# EAGLE board MotherBoardRev2 (EAGLE 7.3.0), part 1 of 2
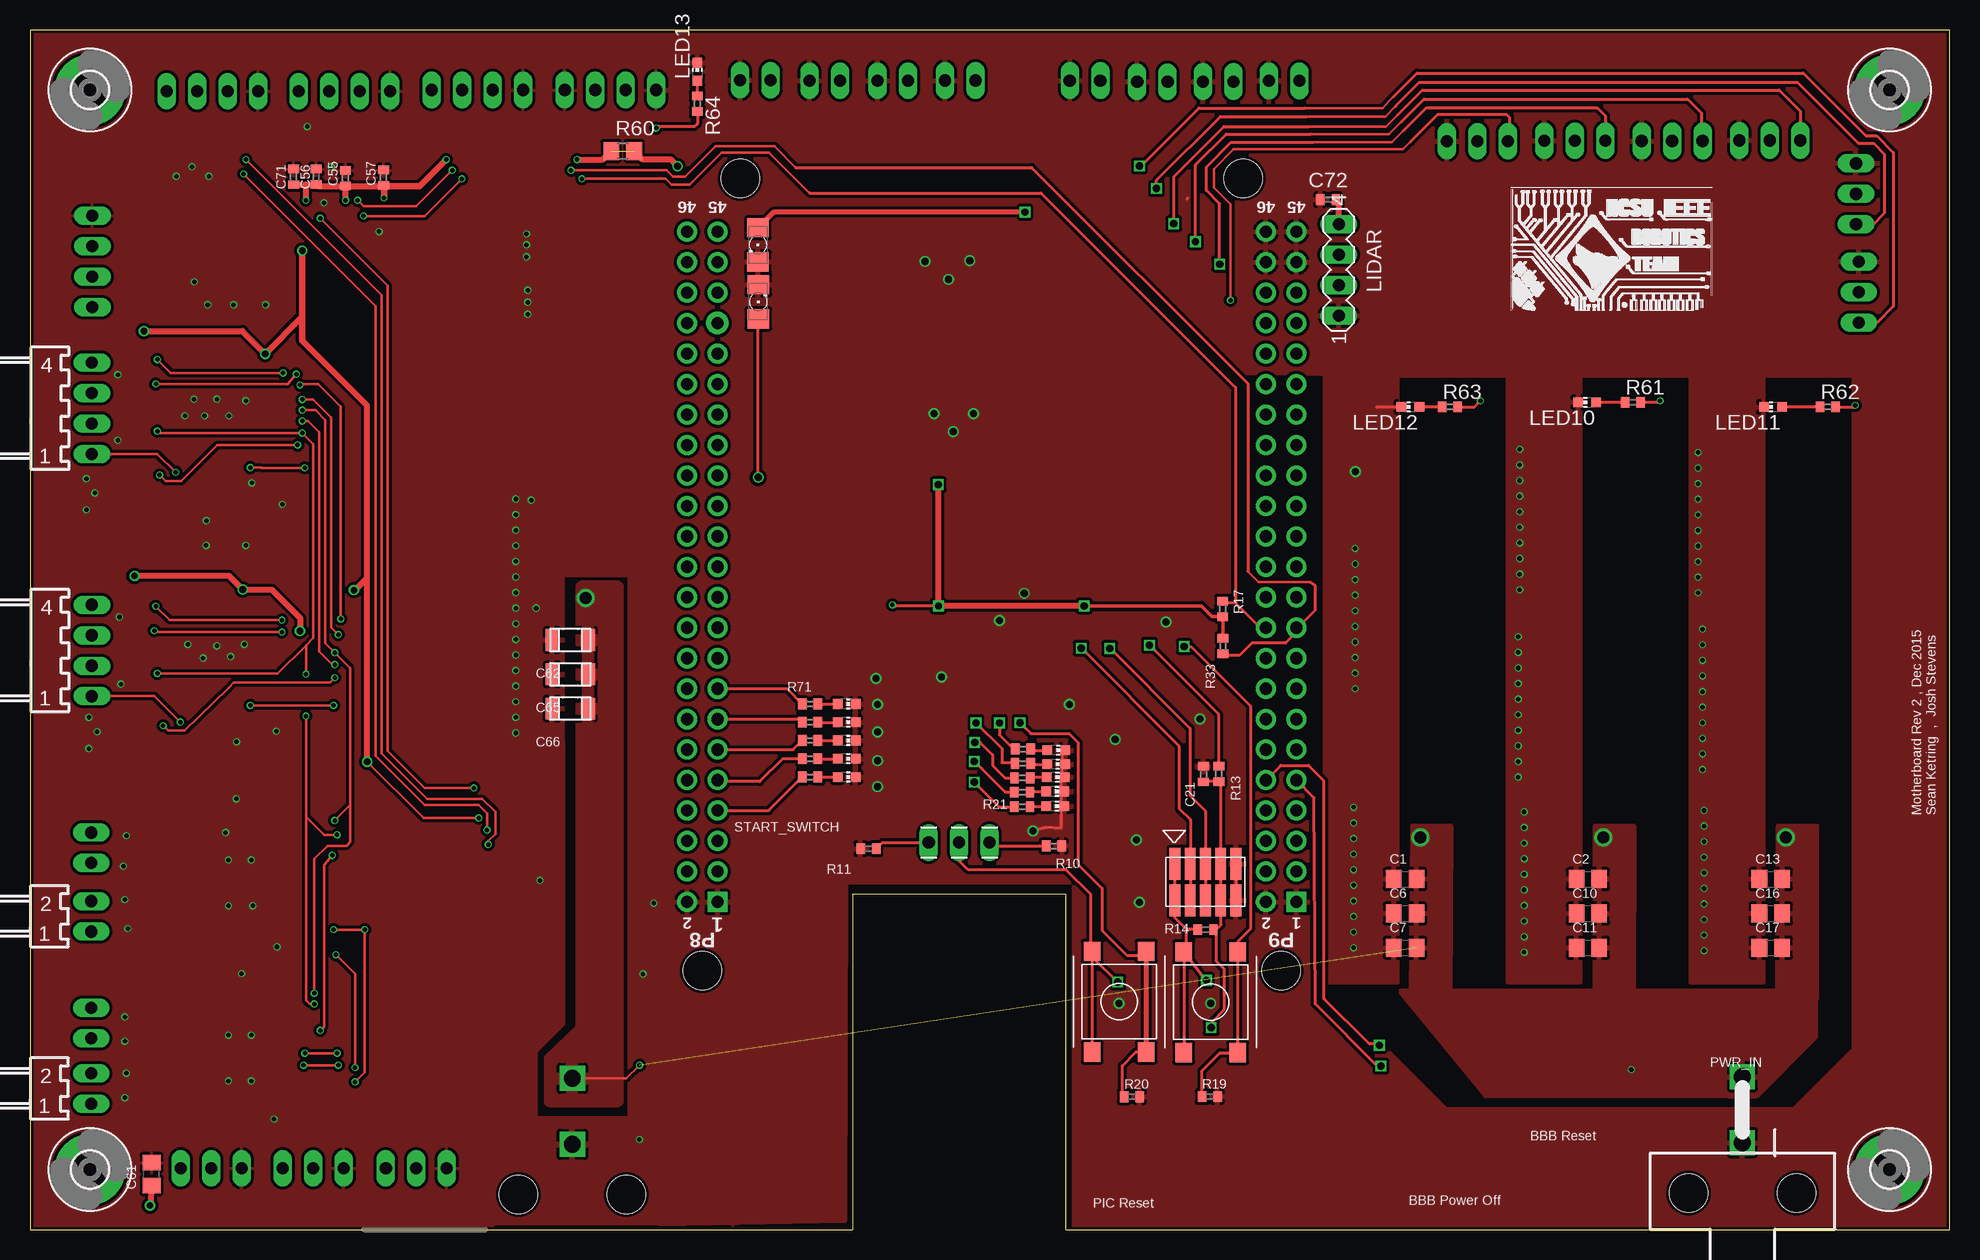
[diagram p0: board, top side]
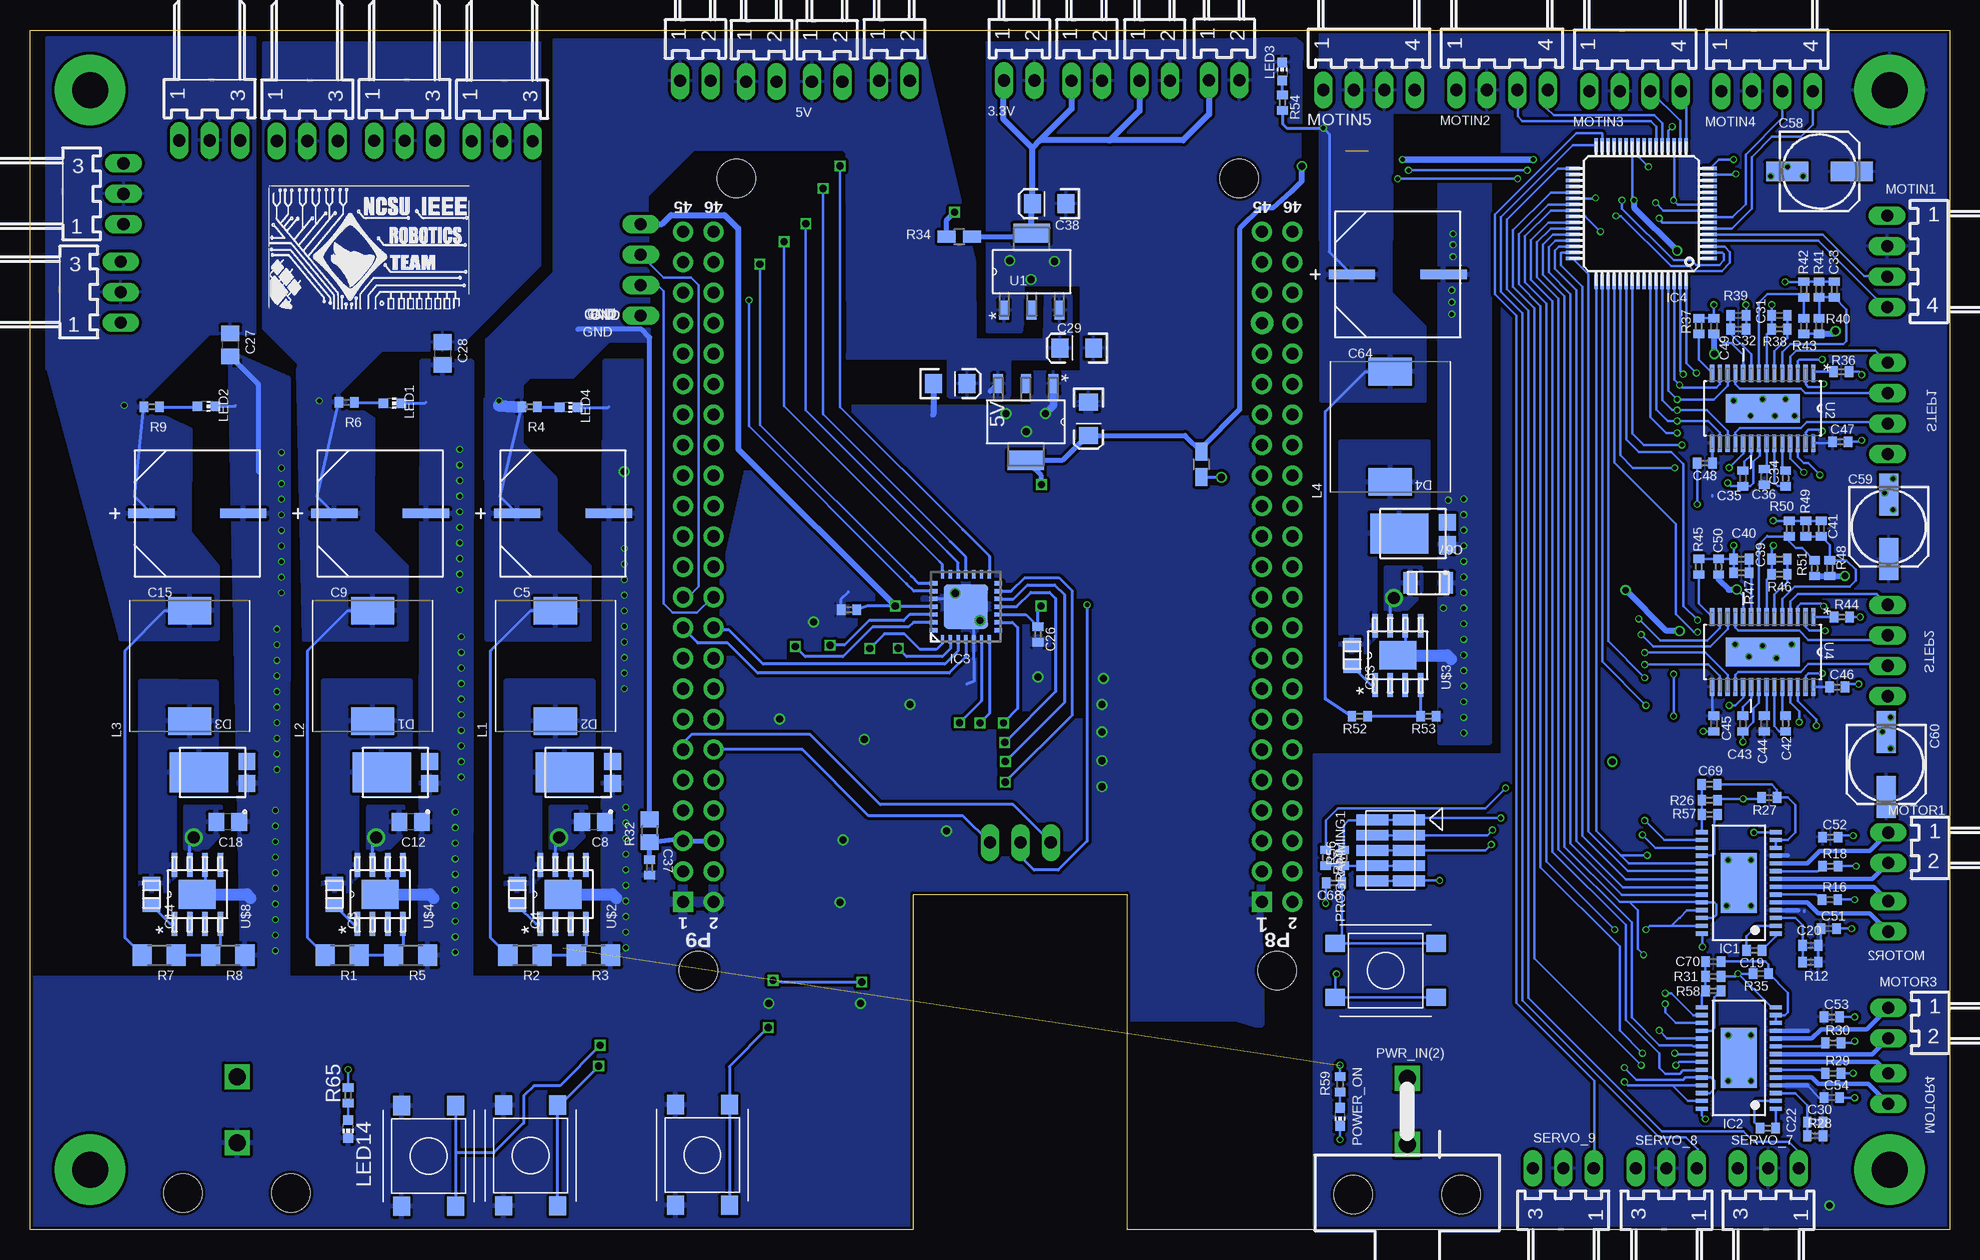
[diagram p1: board, bottom side, seen from below]

Size 160 x 100 mm. Coordinates in mm from the lower left corner, seen from the top.
Outline: 86.36,0 160,0 160,100 0,100 0,0 68.58,0 68.58,27.94 86.36,27.94 86.36,0
Copper layers (1*16): Top 0.035mm / dielectric 1.5mm / Bottom 0.035mm
Design rules "EagleRules-2-Layer-Shep *": minimum track width 6mil, minimum drill 12mil, track to track 6mil, track to pad 6mil, pad to pad 6mil, via to via 6mil, smd to smd 0mil, copper to edge 10mil, drill to drill 10mil, minimum pad ring 2mil, minimum via ring 2mil, stop-mask expansion 2mil, vias tented up to drill 100mil, thermal gap 10mil
Net classes: 0 default: width 0.203 mm, drill 0.33 mm, clearance 0.254 mm; 1 +3v3: width 0.406 mm, drill 0.457 mm, clearance 0.254 mm; 2 VM: width 0.508 mm, drill 0.533 mm, clearance 0.254 mm

## Footprints (pad centres in the part's own frame; a part is rotated, then mirrored left to right if it is on the bottom)
7395-02 = drill 1.016 long: 1 1.27,0; 2 -1.27,0
C0805 = smd 1.3 x 1.5: 1 -0.95,0; 2 0.95,0
0805 = smd 1.118 x 1.448: 1 -0.902,0; 2 0.902,0
SM_RADIAL_10AMM = smd 3.861 x 0.787: 1 -3.823,0; 2 3.823,0
C0402 = smd 0.7 x 0.9: 1 -0.65,0; 2 0.65,0
EIA3216 = smd 1.4 x 1.6: A 1.4,0; C -1.4,0
153CLV-0605 = smd 3.5 x 1.6: + 2.7,0; - -2.7,0
1206 = smd 1.118 x 1.803: 1 -1.499,0; 2 1.499,0
POWERDI5 = smd 1.397 x 1.397: 1 -0.92,-2.857; 2 0.92,-2.857 | smd 3.353 x 4.851: 3 0,1.13
FKIT-LED-1206 = smd 1.6 x 1.803: A -1.422,0; C 1.422,0
3,0-PAD = drill 3 pad 5.842: B3,0 0,0
TSSOP-28 = smd 0.35 x 1: 1 -4.225,-3.087; 2 -3.575,-3.087; 3 -2.925,-3.087; 4 -2.275,-3.087; 5 -1.625,-3.087; 6 -0.975,-3.087; 7 -0.325,-3.087; 8 0.325,-3.087; 9 0.975,-3.087; 10 1.625,-3.087; 11 2.275,-3.087; 12 2.925,-3.087; 13 3.575,-3.087; 14 4.225,-3.087; 15 4.225,3.087; 16 3.575,3.087; 17 2.925,3.087; 18 2.275,3.087; 19 1.625,3.087; 20 0.975,3.087; 21 0.325,3.087; 22 -0.325,3.087; 23 -0.975,3.087; 24 -1.625,3.087; 25 -2.275,3.087; 26 -2.925,3.087; 27 -3.575,3.087; 28 -4.225,3.087 | smd 5 x 3: EXP 0,0
QFN28-ML_6X6MM = smd 0.7 x 0.35: 1 -2.7,1.95; 2 -2.7,1.3; 3 -2.7,0.65; 4 -2.7,0; 5 -2.7,-0.65; 6 -2.7,-1.3; 7 -2.7,-1.95; 15 2.7,-1.95; 16 2.7,-1.3; 17 2.7,-0.65; 18 2.7,0; 19 2.7,0.65; 20 2.7,1.3; 21 2.7,1.95 | smd 0.35 x 0.7: 8 -1.95,-2.7; 9 -1.3,-2.7; 10 -0.65,-2.7; 11 0,-2.7; 12 0.65,-2.7; 13 1.3,-2.7; 14 1.95,-2.7; 22 1.95,2.7; 23 1.3,2.7; 24 0.65,2.7; 25 0,2.7; 26 -0.65,2.7; 27 -1.3,2.7; 28 -1.95,2.7 | smd 3.7 x 3.7: EXP 0,0
TQFP64-10X10 = smd 1.2 x 0.3: 1 -5.7,3.75; 2 -5.7,3.25; 3 -5.7,2.75; 4 -5.7,2.25; 5 -5.7,1.75; 6 -5.7,1.25; 7 -5.7,0.75; 8 -5.7,0.25; 9 -5.7,-0.25; 10 -5.7,-0.75; 11 -5.7,-1.25; 12 -5.7,-1.75; 13 -5.7,-2.25; 14 -5.7,-2.75; 15 -5.7,-3.25; 16 -5.7,-3.75; 33 5.7,-3.75; 34 5.7,-3.25; 35 5.7,-2.75; 36 5.7,-2.25; 37 5.7,-1.75; 38 5.7,-1.25; 39 5.7,-0.75; 40 5.7,-0.25; 41 5.7,0.25; 42 5.7,0.75; 43 5.7,1.25; 44 5.7,1.75; 45 5.7,2.25; 46 5.7,2.75; 47 5.7,3.25; 48 5.7,3.75 | smd 0.3 x 1.2: 17 -3.75,-5.7; 18 -3.25,-5.7; 19 -2.75,-5.7; 20 -2.25,-5.7; 21 -1.75,-5.7; 22 -1.25,-5.7; 23 -0.75,-5.7; 24 -0.25,-5.7; 25 0.25,-5.7; 26 0.75,-5.7; 27 1.25,-5.7; 28 1.75,-5.7; 29 2.25,-5.7; 30 2.75,-5.7; 31 3.25,-5.7; 32 3.75,-5.7; 49 3.75,5.7; 50 3.25,5.7; 51 2.75,5.7; 52 2.25,5.7; 53 1.75,5.7; 54 1.25,5.7; 55 0.75,5.7; 56 0.25,5.7; 57 -0.25,5.7; 58 -0.75,5.7; 59 -1.25,5.7; 60 -1.75,5.7; 61 -2.25,5.7; 62 -2.75,5.7; 63 -3.25,5.7; 64 -3.75,5.7
WE-HCC_1090 = smd 2.3 x 3.6: 1 -4.6,0; 2 4.6,0
CHIP-LED0603 = smd 0.8 x 0.8: A 0,-0.75; C 0,0.75
MA04-1 = drill 1.016 long: 1 -3.81,0; 2 -1.27,0; 3 1.27,0; 4 3.81,0
7395-04 = drill 1.016 long: 1 3.81,0; 2 1.27,0; 3 -1.27,0; 4 -3.81,0
MOTHER-BOARD-REV5_10-PIN-SMD = smd 0.889 x 2.667: 1 -2.54,1.524; 2 -2.54,-1.524; 3 -1.27,1.524; 4 -1.27,-1.524; 5 0,1.524; 6 0,-1.524; 7 1.27,1.524; 8 1.27,-1.524; 9 2.54,1.524; 10 2.54,-1.524
5569-2 = drill 1.4 square: 1 0,0; 2 0,5.5 | hole 3.2: 4.5,-4.2; -4.5,-4.2
R1206 = smd 1.6 x 1.803: 1 -1.422,0; 2 1.422,0
R0402 = smd 0.7 x 0.9: 1 -0.65,0; 2 0.65,0
R0805W = smd 1.5 x 1: 1 -1.052,0; 2 1.052,0
R0805 = smd 1.3 x 1.5: 1 -0.95,0; 2 0.95,0
7395-03 = drill 1.016 long: 1 2.54,0; 2 0,0; 3 -2.54,0
MA03-1 = drill 1.016 long: 1 -2.54,0; 2 0,0; 3 2.54,0
SOT230P696X180-4N = smd 1.6 x 0.838: 1 -3.2,2.311; 2 -3.2,0; 3 -3.2,-2.311 | smd 1.6 x 3.023: 4 3.2,0
SOP65P640X120-29N = smd 1.473 x 0.356: 1 -2.921,4.216; 2 -2.921,3.581; 3 -2.921,2.921; 4 -2.921,2.286; 5 -2.921,1.626; 6 -2.921,0.965; 7 -2.921,0.33; 8 -2.921,-0.33; 9 -2.921,-0.965; 10 -2.921,-1.626; 11 -2.921,-2.286; 12 -2.921,-2.921; 13 -2.921,-3.581; 14 -2.921,-4.216; 15 2.921,-4.216; 16 2.921,-3.581; 17 2.921,-2.921; 18 2.921,-2.286; 19 2.921,-1.626; 20 2.921,-0.965; 21 2.921,-0.33; 22 2.921,0.33; 23 2.921,0.965; 24 2.921,1.626; 25 2.921,2.286; 26 2.921,2.921; 27 2.921,3.581; 28 2.921,4.216 | smd 2.388 x 6.172: 29 0,0
BEAGLE_BONE_BLACK_CAPE = drill 1.016 pad 1.676 square: P8.1 20.32,50.165; P9.1 20.32,1.905 | drill 1.016 pad 1.676: P8.2 20.32,52.705; P8.3 22.86,50.165; P8.4 22.86,52.705; P8.5 25.4,50.165; P8.6 25.4,52.705; P8.7 27.94,50.165; P8.8 27.94,52.705; P8.9 30.48,50.165; P8.10 30.48,52.705; P8.11 33.02,50.165; P8.12 33.02,52.705; P8.13 35.56,50.165; P8.14 35.56,52.705; P8.15 38.1,50.165; P8.16 38.1,52.705; P8.17 40.64,50.165; P8.18 40.64,52.705; P8.19 43.18,50.165; P8.20 43.18,52.705; P8.21 45.72,50.165; P8.22 45.72,52.705; P8.23 48.26,50.165; P8.24 48.26,52.705; P8.25 50.8,50.165; P8.26 50.8,52.705; P8.27 53.34,50.165; P8.28 53.34,52.705; P8.29 55.88,50.165; P8.30 55.88,52.705; P8.31 58.42,50.165; P8.32 58.42,52.705; P8.33 60.96,50.165; P8.34 60.96,52.705; P8.35 63.5,50.165; P8.36 63.5,52.705; P8.37 66.04,50.165; P8.38 66.04,52.705; P8.40 68.58,52.705; P8.41 71.12,50.165; P8.42 71.12,52.705; P8.43 73.66,50.165; P8.44 73.66,52.705; P8.45 76.2,50.165; P8.46 76.2,52.705; P9.2 20.32,4.445; P9.3 22.86,1.905; P9.4 22.86,4.445; P9.5 25.4,1.905; P9.6 25.4,4.445; P9.7 27.94,1.905; P9.8 27.94,4.445; P9.9 30.48,1.905; P9.10 30.48,4.445; P9.11 33.02,1.905; P9.12 33.02,4.445; P9.13 35.56,1.905; P9.14 35.56,4.445; P9.15 38.1,1.905; P9.16 38.1,4.445; P9.17 40.64,1.905; P9.18 40.64,4.445; P9.19 43.18,1.905; P9.20 43.18,4.445; P9.21 45.72,1.905; P9.22 45.72,4.445; P9.23 48.26,1.905; P9.24 48.26,4.445; P9.25 50.8,1.905; P9.26 50.8,4.445; P9.27 53.34,1.905; P9.28 53.34,4.445; P9.29 55.88,1.905; P9.30 55.88,4.445; P9.31 58.42,1.905; P9.32 58.42,4.445; P9.33 60.96,1.905; P9.34 60.96,4.445; P9.35 63.5,1.905; P9.36 63.5,4.445; P9.37 66.04,1.905; P9.38 66.04,4.445; P9.39 68.58,1.905; P9.40 68.58,4.445; P9.41 71.12,1.905; P9.42 71.12,4.445; P9.43 73.66,1.905; P9.44 73.66,4.445; P9.45 76.2,1.905; P9.46 76.2,4.445 | drill 1.016 pad 1.88: P8.39 68.58,50.165 | hole 3.175: 14.605,3.175; 80.645,6.35; 80.645,48.26; 14.605,51.435
R-PDSO-G8 = smd 1.981 x 0.457: 1 -2.464,1.905; 2 -2.464,0.635; 3 -2.464,-0.635; 4 -2.464,-1.905; 5 2.464,-1.905; 6 2.464,-0.635; 7 2.464,0.635; 8 2.464,1.905 | smd 2.388 x 3.099: 9 0,0
MC32882_FINAL = smd 1.6 x 1.4: P$1 -4.2,-2.25; P$2 -4.2,2.25; P$3 4.2,2.25; P$4 4.2,-2.25

## Placement (x,y rotation side)
3.3V  [7395-02]  77.54,95.79 180 bottom
3.3V1  [7395-02]  66.25,95.77 180 bottom
3.3V(2)  [7395-02]  71.91,95.77 180 bottom
3.3V(2)1  [7395-02]  60.45,95.81 180 bottom
5V  [7395-02]  93.56,95.68 180 bottom
5V1  [7395-02]  99.04,95.7 180 bottom
5V(2)  [7395-02]  87.94,95.78 180 bottom
5V(2)1  [7395-02]  104.53,95.76 180 bottom
C1  4.7uF  [C0805]  114.62,29.21 0 top
C2  4.7uF  [C0805]  129.86,29.21 0 top
C3  10nF  [0805]  134.62,27.94 90 bottom
C4  10nF  [0805]  119.38,27.94 90 bottom
C5  330uF  [SM_RADIAL_10AMM]  115.57,59.69 0 bottom
C6  4.7uF  [C0805]  114.62,26.35 0 top
C7  4.7uF  [C0805]  114.62,23.5 0 top
C8  4.7uF  [C0805]  113.03,33.97 180 bottom
C9  330uF  [SM_RADIAL_10AMM]  130.81,59.69 0 bottom
C10  4.7uF  [C0805]  129.86,26.35 0 top
C11  4.7uF  [C0805]  129.86,23.5 0 top
C12  4.7uF  [C0805]  128.27,33.97 180 bottom
C13  4.7uF  [C0805]  145.1,29.21 0 top
C14  10nF  [0805]  149.86,27.94 90 bottom
C15  330uF  [SM_RADIAL_10AMM]  146.05,59.69 0 bottom
C16  4.7uF  [C0805]  145.1,26.35 0 top
C17  4.7uF  [C0805]  145.1,23.5 0 top
C18  4.7uF  [C0805]  143.51,33.97 180 bottom
C19  0.01uF  [C0402]  16.28,23.28 180 bottom
C20  0.1uF  [C0402]  11.58,23.69 0 bottom
C21  .1uF  [C0402]  97.82,37.96 90 top
C22  0.01uF  [C0402]  15.14,8.45 180 bottom
C23  10uF  [EIA3216]  83.29,70.51 0 bottom
C24  10uF  [EIA3216]  71.77,67.59 270 bottom
C25  .1uF  [C0402]  91.73,51.67 180 bottom
C26  .1uF  [C0402]  75.98,49.61 270 bottom
C27  10uF  [C0805]  143.31,73.76 270 bottom
C28  10uF  [C0805]  125.61,73.03 270 bottom
C29  10uF  [EIA3216]  72.74,73.49 180 bottom
C30  0.1uF  [C0402]  11.2,8.96 0 bottom
C31  1nF  [C0402]  14.18,76.21 180 bottom
C32  1nF  [C0402]  17.6,75.07 0 bottom
C33  0.1uF  [C0402]  9.6,78.37 90 bottom
C34  0.22uF  [C0402]  13.67,62.62 90 bottom
C35  0.22uF  [C0402]  17.22,62.62 270 bottom
C36  0.22uF  [C0402]  15.45,62.75 90 bottom
C37  .1uF  [C0402]  108.35,30.18 270 bottom
C38  10uF  [EIA3216]  75.05,85.52 180 bottom
C39  1nF  [C0402]  14.18,55.89 180 bottom
C40  1nF  [C0402]  17.35,55.89 180 bottom
C41  .1uF  [C0402]  10.69,58.43 90 bottom
C42  0.22uF  [C0402]  13.67,42.17 90 bottom
C43  0.22uF  [C0402]  17.22,42.17 270 bottom
C44  0.22uF  [C0402]  15.45,42.17 90 bottom
C45  0.1uF  [C0402]  19.64,42.17 270 bottom
C46  0.1uF  [C0402]  9.35,45.22 0 bottom
C47  0.1uF  [C0402]  9.1,65.67 0 bottom
C48  0.1uF  [C0402]  20.4,63.89 180 bottom
C49  0.1uF  [C0402]  19.64,75.32 90 bottom
C50  0.1uF  [C0402]  19.25,55.26 90 bottom
C51  0.01uF  [C0402]  10.06,25.09 0 bottom
C52  0.01uF  [C0402]  9.93,32.71 0 bottom
C53  0.01uF  [C0402]  9.81,17.72 0 bottom
C54  0.01uF  [C0402]  9.81,10.99 0 bottom
C55  1uF  [C0402]  26.3,87.65 90 top
C56  0.1uF  [C0402]  23.86,87.76 90 top
C57  0.1uF  [C0402]  29.47,87.68 90 top
C58  [153CLV-0605]  10.84,88.2 0 bottom
C59  [153CLV-0605]  5.06,58.58 270 bottom
C60  [153CLV-0605]  5.27,38.76 270 bottom
C61  10uF  [C0805]  10.13,4.63 90 top
C62  4.7uF  [1206]  45.04,49.14 0 top
C63  10nF  [0805]  49.8,47.87 90 bottom
C64  330uF  [SM_RADIAL_10AMM]  45.99,79.62 0 bottom
C65  4.7uF  [1206]  45.04,46.28 0 top
C66  4.7uF  [1206]  45.04,43.42 0 top
C67  4.7uF  [1206]  43.45,53.9 180 bottom
C68  .1uF  [C0402]  51.3,28.9 180 bottom
C69  0.47uF  [C0402]  20,35.8 0 bottom
C70  0.47uF  [C0402]  19.7,21.1 0 bottom
C71  0.1uF  [C0402]  21.97,87.76 90 top
C72  4.7uF  [C0402]  108.2,85.85 180 top
D1  PDS760-13  [POWERDI5]  129.54,38.1 90 bottom
D2  PDS760-13  [POWERDI5]  114.3,38.1 90 bottom
D3  PDS760-13  [POWERDI5]  144.78,38.1 90 bottom
D4  PDS760-13  [POWERDI5]  44.72,58.03 90 bottom
D5  3_3V_PWR  [FKIT-LED-1206]  60.7,77.35 90 top
D7  3_3V_PWR  [FKIT-LED-1206]  60.68,82.09 270 top
H1  MOUNT-PAD-ROUND3.0  [3,0-PAD]  155,95 0 top
H2  MOUNT-PAD-ROUND3.0  [3,0-PAD]  5,5 0 top
H3  MOUNT-PAD-ROUND3.0  [3,0-PAD]  155,5 0 top
H4  MOUNT-PAD-ROUND3.0  [3,0-PAD]  5,95 0 top
IC1  DRV8814  [TSSOP-28]  17.55,28.9 90 bottom
IC2  DRV8814  [TSSOP-28]  17.55,14.29 90 bottom
IC3  PIC24FJ64GB202  [QFN28-ML_6X6MM]  81.99,51.92 90 bottom
IC4  PIC24FJ256GB106  [TQFP64-10X10]  25.7,84.7 180 bottom
L1  [WE-HCC_1090]  116.2,46.99 90 bottom
L2  [WE-HCC_1090]  131.44,46.99 90 bottom
L3  [WE-HCC_1090]  146.69,46.99 90 bottom
L4  [WE-HCC_1090]  46.62,66.92 90 bottom
LED1  [CHIP-LED0603]  129.79,68.89 270 bottom
LED2  [CHIP-LED0603]  145.28,68.63 270 bottom
LED3  [CHIP-LED0603]  55.62,96.56 0 bottom
LED4  [CHIP-LED0603]  115.1,68.54 270 bottom
LED5  [CHIP-LED0603]  85.46,35.28 270 top
LED6  [CHIP-LED0603]  85.46,36.52 270 top
LED7  [CHIP-LED0603]  85.5,37.71 270 top
LED8  [CHIP-LED0603]  85.53,38.79 270 top
LED9  [CHIP-LED0603]  85.56,39.96 270 top
LED10  [CHIP-LED0603]  129.79,68.96 90 top
LED11  [CHIP-LED0603]  145.29,68.58 90 top
LED12  [CHIP-LED0603]  115.06,68.58 90 top
LED13  [CHIP-LED0603]  55.63,96.52 0 top
LED14  [CHIP-LED0603]  133.48,8.38 180 bottom
LED16  [CHIP-LED0603]  68.07,37.72 270 top
LED17  [CHIP-LED0603]  68.07,39.24 270 top
LED18  [CHIP-LED0603]  68.07,40.77 270 top
LED19  [CHIP-LED0603]  68.07,42.29 270 top
LED20  [CHIP-LED0603]  68.07,43.81 270 top
LIDAR  [MA04-1]  109.09,80.01 90 top
MOTIN1  22-05-7048-04  [7395-04]  5.2,80.7 90 bottom
MOTIN2  22-05-7048-04  [7395-04]  37.3,95 180 bottom
MOTIN3  22-05-7048-04  [7395-04]  26.2,94.9 180 bottom
MOTIN4  22-05-7048-04  [7395-04]  15.2,94.9 180 bottom
MOTIN5  22-05-7048-04  [7395-04]  48.39,95 180 bottom
MOTOR1  22-05-7028-02  [7395-02]  5.11,31.82 90 bottom
MOTOR2  22-05-7028-02  [7395-02]  5.11,26.11 270 top
MOTOR3  22-05-7028-02  [7395-02]  5.11,17.21 90 bottom
MOTOR4  22-05-7028-02  [7395-02]  5.11,11.75 270 top
POWER_ON  [CHIP-LED0603]  50.8,9.4 180 bottom
PROGRAMMING  Jtag  [MOTHER-BOARD-REV5_10-PIN-SMD]  97.98,28.97 0 top
PROGRAMMING1  Jtag  [MOTHER-BOARD-REV5_10-PIN-SMD]  46.6,31.6 270 bottom
PWR_IN  [5569-2]  142.74,7.24 0 top
PWR_IN(2)  [5569-2]  45.2,7.1 0 bottom
R1  10k  [R1206]  133.99,22.86 180 bottom
R2  10k  [R1206]  118.75,22.86 180 bottom
R3  [R1206]  113.03,22.86 180 bottom
R4  10k  [R0402]  118.36,68.58 180 bottom
R5  [R1206]  128.27,22.86 180 bottom
R6  10k  [R0402]  133.6,68.96 180 bottom
R7  10k  [R1206]  149.22,22.86 180 bottom
R8  [R1206]  143.51,22.86 180 bottom
R9  10k  [R0402]  149.86,68.58 180 bottom
R10  10K  [R0402]  85.35,31.97 180 top
R11  10K  [R0402]  69.89,31.75 0 top
R12  1M  [R0402]  11.58,22.3 0 bottom
R13  100  [R0402]  99.1,37.98 270 top
R14  10k  [R0402]  98,25 180 top
R15  [R0805W]  62.37,63.79 270 bottom
R16  0.2  [R0402]  9.96,27.5 0 bottom
R17  4.7K  [R0402]  99.41,51.74 270 top
R18  0.2  [R0402]  9.93,30.3 0 bottom
R19  10K  [R0402]  98.34,11.09 0 top
R20  10K  [R0402]  91.85,11.07 0 top
R21  330  [R0402]  82.71,35.25 180 top
R22  330  [R0402]  82.7,36.46 180 top
R23  330  [R0402]  82.71,37.65 180 top
R24  330  [R0402]  82.76,38.86 180 top
R25  330  [R0402]  82.77,40.05 180 top
R26  10k  [R0402]  20,37.11 180 bottom
R27  30k  [R0402]  15.01,36.01 180 bottom
R28  1M  [R0402]  11.2,7.82 0 bottom
R29  0.2  [R0402]  9.71,13.02 0 bottom
R30  0.2  [R0402]  9.71,15.56 0 bottom
R31  10k  [R0402]  19.69,22.34 180 bottom
R32  0 ohm  [R0805]  108.34,33.24 90 bottom
R33  4.7K  [R0402]  99.44,48.64 90 top
R34  [R0805W]  82.54,82.76 180 bottom
R35  30k  [R0402]  15.73,21.34 180 bottom
R36  0.1  [R0402]  9.02,71.51 0 bottom
R37  0.1  [R0402]  20.91,75.32 90 bottom
R38  47k  [R0402]  14.18,75.07 180 bottom
R39  47k  [R0402]  17.6,76.21 0 bottom
R40  10k  [R0402]  10.87,75.32 90 bottom
R41  10k  [R0402]  10.87,78.37 90 bottom
R42  10k  [R0402]  12.14,78.37 90 bottom
R43  10k  [R0402]  12.14,75.32 90 bottom
R44  0.1  [R0402]  8.97,51.06 0 bottom
R45  0.1  [R0402]  20.91,55.26 90 bottom
R46  47k  [R0402]  14.18,54.62 180 bottom
R47  47k  [R0402]  17.35,54.75 180 bottom
R48  10k  [R0402]  9.98,55.13 90 bottom
R49  10k  [R0402]  11.98,58.43 90 bottom
R50  10k  [R0402]  13.35,58.43 90 bottom
R51  10k  [R0402]  11.25,55.13 90 bottom
R52  10k  [R0402]  49.16,42.79 180 bottom
R53  [R0402]  43.45,42.79 180 bottom
R54  10k  [R0402]  55.6,93.94 270 bottom
R55  100  [R0402]  52,31 270 bottom
R56  10k  [R0402]  50.5,31 90 bottom
R57  10k  [R0402]  20,34.6 180 bottom
R58  10k  [R0402]  19.7,19.9 180 bottom
R59  10k  [R0402]  50.8,12.1 90 bottom
R60  [R0805]  49.4,89.92 0 top
R61  10k  [R0402]  133.6,68.96 0 top
R62  10k  [R0402]  149.86,68.58 0 top
R63  10k  [R0402]  118.36,68.58 0 top
R64  10k  [R0402]  55.63,93.85 270 top
R65  10k  [R0402]  133.48,11.18 90 bottom
R67  1K  [R0402]  65.02,37.72 180 top
R68  1K  [R0402]  65.02,39.24 180 top
R69  1K  [R0402]  65.02,40.77 180 top
R70  1K  [R0402]  65.02,42.29 180 top
R71  1K  [R0402]  65.02,43.81 180 top
SERVO_1  [7395-03]  152.45,78.16 270 bottom
SERVO_2  [7395-03]  152.21,86.34 270 bottom
SERVO_3  [7395-03]  145.03,90.79 180 bottom
SERVO_4  [7395-03]  136.88,90.74 180 bottom
SERVO_5  [7395-03]  128.78,90.76 180 bottom
SERVO_6  [7395-03]  120.65,90.72 180 bottom
SERVO_7  [7395-03]  15.1,5.1 0 bottom
SERVO_8  [7395-03]  23.6,5.1 0 bottom
SERVO_9  [7395-03]  32.2,5.1 0 bottom
START_SWITCH  [MA03-1]  77.45,32.26 0 top
STEP1  22-05-7048-04  [7395-04]  5.16,68.46 270 top
STEP2  22-05-7048-04  [7395-04]  5.16,48.27 270 top
U1  LMS8117AMP-3.3  [SOT230P696X180-4N]  76.51,79.85 90 bottom
U2  DRV8811PWP  [SOP65P640X120-29N]  15.57,68.46 270 bottom
U3  LMS8117AMP-3.3  [SOT230P696X180-4N]  76.99,67.33 270 bottom
U4  DRV8811PWP  [SOP65P640X120-29N]  15.57,48.14 270 bottom
U$1  BEAGLE_BONE_BLACK_CAPE  [BEAGLE_BONE_BLACK_CAPE]  107.47,6.99 90 top
U$2  TPS5450DDAR  [R-PDSO-G8]  115.57,27.94 90 bottom
U$3  TPS5450DDAR  [R-PDSO-G8]  45.99,47.87 90 bottom
U$4  TPS5450DDAR  [R-PDSO-G8]  130.81,27.94 90 bottom
U$5  Switch3  [MC32882_FINAL]  103.95,6.21 270 bottom
U$6  Switch1  [MC32882_FINAL]  98.42,18.94 270 top
U$7  Switch2  [MC32882_FINAL]  90.79,18.99 270 top
U$8  TPS5450DDAR  [R-PDSO-G8]  146.05,27.94 90 bottom
U$9  Switch3  [MC32882_FINAL]  47,21.6 0 bottom
U$10  LOGO  [LOGO]  130.56,80.9 0 top
U$11  LOGO  [LOGO]  130.68,80.9 0 top
U$12  LOGO  [LOGO]  132.97,81.03 0 bottom
U$13  Switch1  [MC32882_FINAL]  118.27,6.17 270 bottom
U$14  Switch1  [MC32882_FINAL]  126.77,6.13 270 bottom

## Library data of the parts
3.3V 3.3V1 3.3V(2) 3.3V(2)1 5V 5V1 5V(2) 5V(2)1 = Son_of_Dark_Powersch; OC_FARNELL: 9731601; OC_NEWARK: unknown
C1 C2 C6-C8 C10-C13 C16-C22 C25-C28 C30-C37 C39-C61 C68-C72 R1-R65 R67-R71 = rcl
C3 C4 C14 C63 = 5v; CAP: 1.0E-8; ESR: 1.739; IRMS: 0.411; MANUFACTURER_NAME: Kemet; MANUFACTURER_PART_NUMBER: C0805C103K5RACTU; VDC: 50.0; VENDOR: Kemet
C5 C9 C15 C64 = 5v; CAP: 3.3E-4; DATASHEETURL: http://www.edc.sanyo.com/english/pdf/oscon/E32.pdf; ESR: 0.025; IRMS: 3.7; MANUFACTURER_NAME: Panasonic; MANUFACTURER_PART_NUMBER: 10SVP330MX; VDC: 10.0; VENDOR: Panasonic
C23 C24 C29 C38 = SparkFun-Capacitors; PROD_ID: CAP-00811
C62 C65-C67 = 5v; CAP: 4.7E-6; ESR: 0.0; IRMS: 0.0; MANUFACTURER_NAME: MuRata; MANUFACTURER_PART_NUMBER: GRM31CR71H475KA12L; VDC: 50.0; VENDOR: MuRata
D1-D4 = 5v; DATASHEETURL: www.diodes.com/datasheets/ds30477.pdf; IO: 7.0; MANUFACTURER_NAME: Diodes Inc.; MANUFACTURER_PART_NUMBER: PDS760-13; VENDOR: Diodes Inc.; VFATIO: 0.56; VRRM: 60.0
D5 D7 = SparkFun-LED
H1-H4 = holes
IC1 IC2 = Motor-Board
IC3 = microchip; MPN: PIC18F26J53-I/ML; OC_FARNELL: unknown; OC_NEWARK: 63R7829
IC4 = microchip; MPN: PIC24FJ256GB106-I/PT; OC_FARNELL: 1576868; OC_NEWARK: 54M5129
L1-L4 = WE-HCC; MPN: 7443331000; OC_FARNELL: 1848254; OC_NEWARK: 13T9771; PACKAGE: 1090; SUPPLIER: Wuerth Elektronik
LED1-LED14 LED16-LED20 POWER_ON = led
LIDAR START_SWITCH = con-lstb; OC_FARNELL: unknown; OC_NEWARK: unknown
MOTIN1-MOTIN5 STEP1 STEP2 = Son_of_Dark_Power; OC_FARNELL: unknown; OC_NEWARK: unknown
MOTOR1-MOTOR4 = Son_of_Dark_Power; OC_FARNELL: 9731601; OC_NEWARK: unknown
PROGRAMMING PROGRAMMING1 = Mother-Board-rev5
PWR_IN PWR_IN(2) U$1 = Son_of_Dark_Powersch
SERVO_1-SERVO_9 = con-molex; OC_FARNELL: unknown; OC_NEWARK: unknown
U1 U3 = NSC-LMS8117AMP; MPN: LMS8117AMP-3.3; OC_FARNELL: 1469032; OC_NEWARK: 41K3020; PACKAGE: SOT-223-3; SUPPLIER: National Semiconductor
U2 U4 = Texas Instruments_By_element14_Batch_1; MPN: DRV8811PWP; OC_FARNELL: 1754829; OC_NEWARK: 24R9116; PACKAGE: HTSSOP-28; SUPPLIER: Texas Instruments
U$2-U$4 U$8 = 5v; DATASHEETURL: http://www.ti.com/product/tps5450; FREQUENCY: 500000.0; IMAX: 5.0; MANUFACTURER_NAME: Texas Instruments; MANUFACTURER_PART_NUMBER: TPS5450DDA; MKTG_PACKAGE: TPS5450; NSID: TPS5450DDAR; PACKAGE: TPS5450; VENDOR: Texas Instruments
U$5-U$7 U$9 U$13 U$14 = Parts4Class
U$10-U$12 = logo

## Nets
3.3V: C24.A C25.1 C26.1 C49.1 C50.1 C55.1 C56.1 C57.1 C71.1 C72.1 IC3.10 IC3.25 IC4.10 IC4.19 IC4.26 IC4.38 LIDAR.4 PROGRAMMING1.1 PROGRAMMING1.2 PROGRAMMING.1 PROGRAMMING.2 R14.2 R15.1 R17.2 R33.2 R40.1 R43.1 R48.1 R51.1 R56.2 R60.1 R60.2 START_SWITCH.2 U2.10 U3.4 U4.10 U$6.P$1 U$6.P$4 U$7.P$1 U$7.P$4
+7V [VM]: C20.2 C30.2 C36.1 C44.1 C45.1 C46.1 C47.1 C48.1 C51.1 C52.1 C53.1 C54.1 C58.+ C59.+ C60.+ C61.1 C64.1 H4.B3,0 IC1.4 IC1.11 IC2.4 IC2.11 L4.2 MOTIN1.2 MOTIN2.2 MOTIN3.2 MOTIN4.2 MOTIN5.2 MOTIN5.3 R12.2 R28.2 R52.2 R54.2 R64.2 SERVO_7.2 SERVO_8.2 SERVO_9.2 U2.15 U2.28 U4.15 U4.28
BB_PWR_BUTTON: U$1.P9.9 U$13.P$2 U$13.P$3
BB_SYS_RESET: U$1.P9.10 U$14.P$2 U$14.P$3
BOOT1: C4.1 U$2.1
BOOT2: C3.1 U$4.1
BOOT3: C14.1 U$8.1
BOOT_VM: C63.1 U$3.1
CHANNEL_A_1: IC4.4 MOTIN1.4
CHANNEL_A_2: IC4.22 MOTIN2.3
CHANNEL_A_3: IC4.18 MOTIN3.3
CHANNEL_A_4: IC4.8 MOTIN4.3
CHANNEL_B_1: IC4.5 MOTIN1.3
CHANNEL_B_2: IC4.21 MOTIN2.4
CHANNEL_B_3: IC4.17 MOTIN3.4
CHANNEL_B_4: IC4.6 MOTIN4.4
GND: 3.3V1.2 3.3V(2)1.2 3.3V(2).2 3.3V.2 5V1.2 5V(2)1.2 5V(2).2 5V.2 C1.1 C2.1 C5.2 C6.1 C7.1 C8.1 C9.2 C10.1 C11.1 C12.1 C13.1 C15.2 C16.1 C17.1 C18.1 C21.2 C23.C C24.C C25.2 C26.2 C27.2 C28.2 C29.C C31.2 C32.2 C33.2 C35.2 C37.2 C38.C C39.2 C40.2 C41.2 C43.2 C45.2 C46.2 C47.2 C48.2 C49.2 C50.2 C51.2 C52.2 C53.2 C54.2 C55.2 C56.2 C57.2 C58.- C59.- C60.- C61.2 C62.1 C64.2 C65.1 C66.1 C67.1 C68.2 C69.2 C70.2 C71.2 C72.2 D1.1 D2.1 D3.1 D4.1 D5.C D7.C IC1.14 IC1.28 IC1.EXP IC2.14 IC2.28 IC2.EXP IC3.5 IC3.24 IC3.EXP IC4.9 IC4.20 IC4.25 IC4.41 LED1.C LED2.C LED3.C LED4.C LED5.C LED6.C LED7.C LED8.C LED9.C LED10.C LED11.C LED12.C LED13.C LED14.C LED16.C LED17.C LED18.C LED19.C LED20.C LIDAR.1 MOTIN1.1 MOTIN2.1 MOTIN3.1 MOTIN4.1 MOTIN5.1 MOTIN5.4 POWER_ON.C PROGRAMMING1.9 PROGRAMMING1.10 PROGRAMMING.9 PROGRAMMING.10 PWR_IN(2).1 PWR_IN.1 R3.1 R5.1 R8.1 R10.1 R11.1 R16.2 R18.2 R19.2 R20.2 R27.2 R29.2 R30.2 R35.2 R36.2 R37.2 R38.2 R39.2 R41.2 R42.2 R44.2 R45.2 R46.2 R47.2 R49.2 R50.2 R53.1 SERVO_1.3 SERVO_2.3 SERVO_3.3 SERVO_4.3 SERVO_5.3 SERVO_6.3 SERVO_7.3 SERVO_8.3 SERVO_9.3 U1.1 U2.7 U2.21 U2.29 U3.1 U4.7 U4.21 U4.29 U$1.P8.1 U$1.P8.2 U$1.P9.1 U$1.P9.2 U$1.P9.43 U$1.P9.44 U$1.P9.45 U$1.P9.46 U$2.6 U$2.9 U$3.6 U$3.9 U$4.6 U$4.9 U$5.P$1 U$5.P$4 U$8.6 U$8.9 U$9.P$1 U$9.P$4 U$13.P$1 U$13.P$4 U$14.P$1 U$14.P$4
GPIO23: R70.2 U$1.P8.13
GPIO45: R69.2 U$1.P8.11
GPIO47: R71.2 U$1.P8.15
GPIO66: R67.2 U$1.P8.7
GPIO69: R68.2 U$1.P8.9
IO3: IC3.7 R25.2
IO4: IC3.9 R24.2
IO5: IC3.11 R23.2
IO6: IC3.12 R22.2
IO7: IC3.13 R21.2
IO8: IC3.28
M1-AENBL: IC1.21 IC4.47
M1-APHASE: IC1.20 IC4.48
M1-BENBL: IC1.22 IC4.46
M1-BHPASE: IC1.23 IC4.45
M1-MAOUT1: IC1.5 MOTOR2.1
M1-MAOUT2: IC1.7 MOTOR2.2
M1-MBOUT1: IC1.10 MOTOR1.1
M1-MBOUT2: IC1.8 MOTOR1.2
M2-AENBL: IC2.21 IC4.39
M2-APHASE: IC2.20 IC4.43
M2-BENBL: IC2.22 IC4.37
M2-BHPASE: IC2.23 IC4.42
M2-MAOUT1: IC2.5 MOTOR4.1
M2-MAOUT2: IC2.7 MOTOR4.2
M2-MBOUT1: IC2.10 MOTOR3.1
M2-MBOUT2: IC2.8 MOTOR3.2
M-DECAY: IC1.19 IC2.19 IC4.49
M-I0: IC1.24 IC1.26 IC2.24 IC2.26 IC4.44
M-I1: IC1.25 IC1.27 IC2.25 IC2.27 IC4.40
M-NSLEEP: IC1.17 IC2.17 IC4.58 U2.27 U4.27
M-RESET: IC1.16 IC2.16 IC4.60 U2.17 U4.17
M_MCLR: C68.1 PROGRAMMING1.7 PROGRAMMING1.8 R55.2 R56.1 U$9.P$2 U$9.P$3
M_MCLR': IC4.7 R55.1
M_PGC1: IC4.15 PROGRAMMING1.3 PROGRAMMING1.4
M_PGD1: IC4.16 PROGRAMMING1.5 PROGRAMMING1.6
MCLR: C21.1 PROGRAMMING.7 PROGRAMMING.8 R13.2 R14.1 U$5.P$2 U$5.P$3
MCLR': IC3.26 R13.1
N$1: LED4.A R4.1
N$2: LED1.A R6.1
N$3: LED2.A R9.1
N$4: C19.2 IC1.2
N$5: LED5.A R21.1
N$6: LED6.A R22.1
N$7: LED7.A R23.1
N$8: LED8.A R24.1
N$9: LED9.A R25.1
N$10: D5.A R15.2
N$11: D7.A R34.2
N$12: C19.1 IC1.1
N$13: C20.1 IC1.3 R12.1
N$14: IC1.6 R16.1
N$15: IC1.9 R18.1
N$16: IC1.12 IC1.13 R26.1 R27.1
N$17: C22.2 IC2.2
N$18: C37.1 R32.1 U$1.P9.5 U$1.P9.6
N$19: LED14.A R65.1
N$20: C22.1 IC2.1
N$21: C30.1 IC2.3 R28.1
N$22: IC2.6 R29.1
N$23: IC2.9 R30.1
N$24: IC2.12 IC2.13 R31.1 R35.1
N$25: IC3.8
N$26: IC1.18 R57.1
N$27: R37.1 U2.14
N$28: R36.1 U2.1
N$29 [+3v3]: C69.1 IC1.15 R26.2 R57.2
N$30: C31.1 R38.1 U2.6
N$31: IC3.14
N$32: C32.1 R39.1 U2.9
N$33: C33.1 R40.2 R41.1 U2.5
N$34: R42.1 R43.2 U2.8
N$35: IC2.18 R58.1
N$36: C34.1 U2.23
N$37 [+3v3]: C70.1 IC2.15 R31.2 R58.2
N$38: C34.2 U2.24
N$39: C35.1 U2.20
N$40: C36.2 U2.22
N$41: R45.1 U4.14
N$42: R44.1 U4.1
N$43: C39.1 R46.1 U4.6
N$44: C40.1 R47.1 U4.9
N$45: C41.1 R48.2 R49.1 U4.5
N$46: R50.1 R51.2 U4.8
N$47: C42.1 U4.23
N$48: C42.2 U4.24
N$49: C43.1 U4.20
N$50: C44.2 U4.22
N$51: LED3.A R54.1
N$52: POWER_ON.A R59.1
N$55: LED16.A R67.1
N$56: LED17.A R68.1
N$57: LED18.A R69.1
N$58: LED19.A R70.1
N$59: LED20.A R71.1
N$60: LED10.A R61.1
N$61: LED11.A R62.1
N$62: LED12.A R63.1
N$63: LED13.A R64.1
OC1: IC3.23 SERVO_6.1
OC1': IC4.33 SERVO_7.1
OC2: IC3.22 SERVO_5.1
OC2': IC4.32 SERVO_8.1
OC3: IC3.21 SERVO_4.1
OC3': IC4.31 SERVO_9.1
OC4: IC3.19 SERVO_3.1
OC5: IC3.18 SERVO_2.1
OC6: IC3.15 SERVO_1.1
PGC1: IC3.2 PROGRAMMING.3 PROGRAMMING.4
PGD1: IC3.1 PROGRAMMING.5 PROGRAMMING.6
PH1: C4.2 D2.3 L1.1 U$2.8
PH2: C3.2 D1.3 L2.1 U$4.8
PH3: C14.2 D3.3 L3.1 U$8.8
PH_VM: C63.2 D4.3 L4.1 U$3.8
S1-AOUT1: STEP1.4 U2.4
S1-AOUT2: STEP1.1 U2.25
S1-BOUT1: STEP1.3 U2.11
S1-BOUT2: STEP1.2 U2.18
S1-DIR: IC4.64 U2.3
S1-ENABLEN: IC4.55 U2.26
S1-HOME: IC4.63 U2.2
S1-STEP: IC4.53 U2.19
S2-AOUT1: STEP2.4 U4.4
S2-AOUT2: STEP2.1 U4.25
S2-BOUT1: STEP2.3 U4.11
S2-BOUT2: STEP2.2 U4.18
S2-DIR: IC4.54 U4.3
S2-ENABLEN: IC4.51 U4.26
S2-HOME: IC4.52 U4.2
S2-STEP: IC4.50 U4.19
S-SRN: IC4.59 U2.16 U4.16
SCL: IC3.4 IC4.2 R33.1 U$1.P9.19
SDA: IC3.3 IC4.3 R17.1 U$1.P9.20
START_LEFT: R10.2 START_SWITCH.3 U$1.P9.12
START_RIGHT: R11.2 START_SWITCH.1 U$1.P9.11
SWITCH_1: IC3.27 R19.1 U$6.P$2 U$6.P$3
SWITCH_2: IC3.6 R20.1 U$7.P$2 U$7.P$3
UART_RX: LIDAR.2 U$1.P9.22
UART_TX: LIDAR.3 U$1.P9.21
USM0: IC4.62 U2.13 U4.13
USM1: IC4.61 U2.12 U4.12
VCC: C1.2 C2.2 C6.2 C7.2 C8.2 C10.2 C11.2 C12.2 C13.2 C16.2 C17.2 C18.2 C62.2 C65.2 C66.2 C67.2 PWR_IN(2).2 PWR_IN.2 R59.2 R65.2 U$2.7 U$3.7 U$4.7 U$8.7
VDDCORE: IC4.56
VOUT1: 5V1.1 5V(2)1.1 5V(2).1 5V.1 C5.1 C23.A C29.A L1.2 R2.2 R4.2 R32.2 R63.2 U1.3 U3.3
VOUT2: C9.1 C28.1 L2.2 R1.2 R6.2 R61.2 SERVO_4.2 SERVO_5.2 SERVO_6.2
VOUT3: C15.1 C27.1 L3.2 R7.2 R9.2 R62.2 SERVO_1.2 SERVO_2.2 SERVO_3.2
VOUT5: 3.3V1.1 3.3V(2)1.1 3.3V(2).1 3.3V.1 C38.A R34.1 U1.4
VSNS1: R2.1 R3.2 U$2.4
VSNS2: R1.1 R5.2 U$4.4
VSNS3: R7.1 R8.2 U$8.4
VSNS_VM: R52.1 R53.2 U$3.4